# EAGLE board IR_Interruptor board (EAGLE 9.6.2)
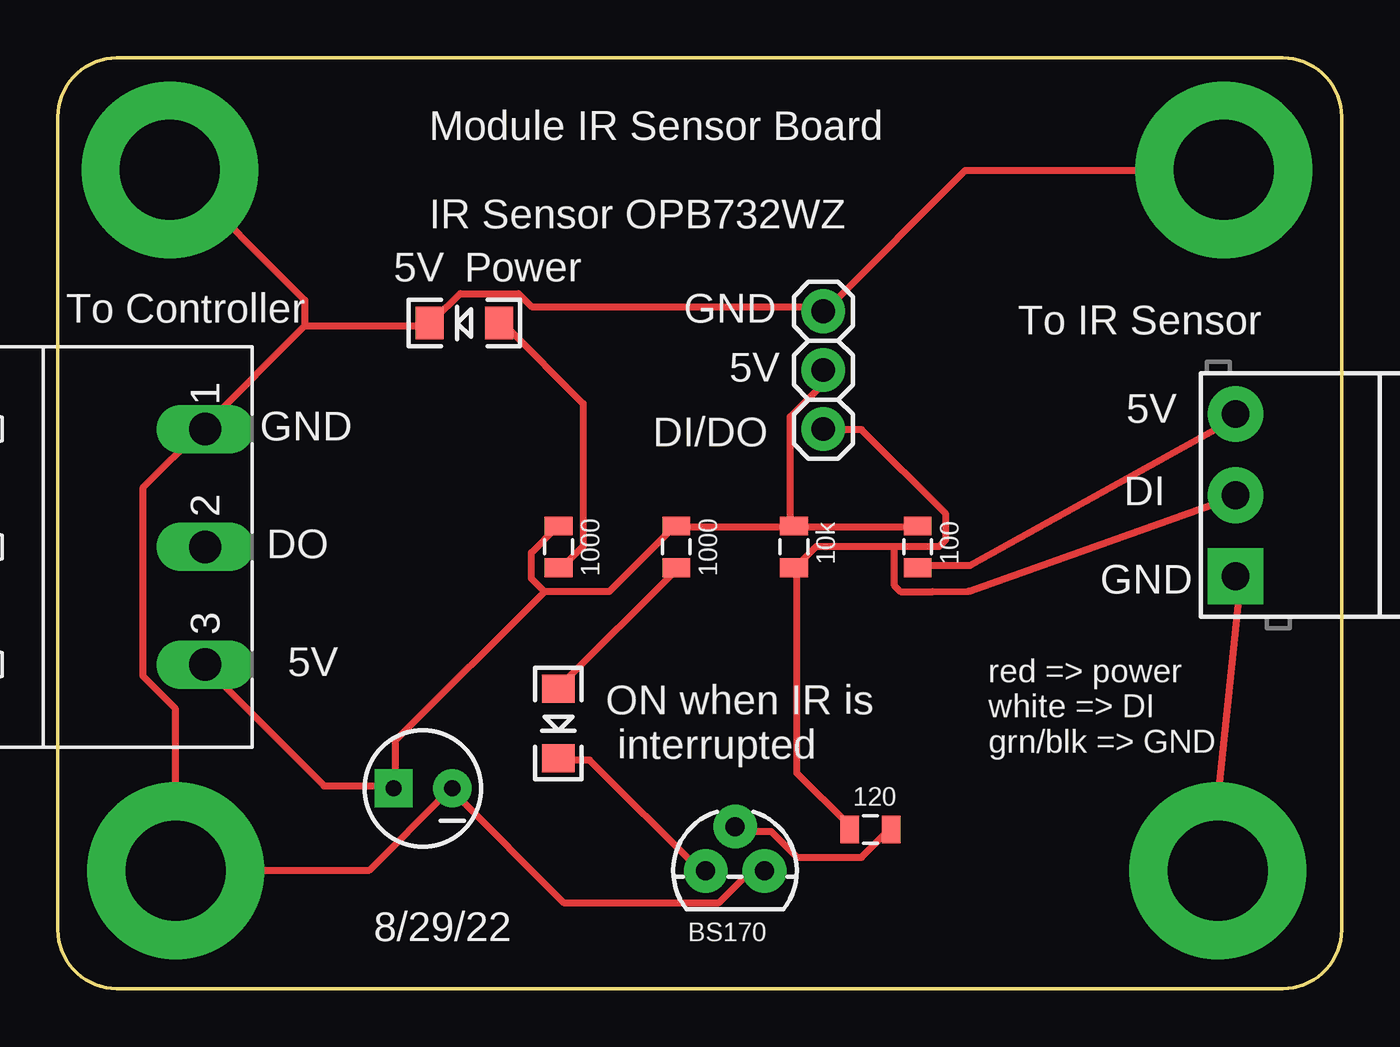
[diagram p0: board, top side]
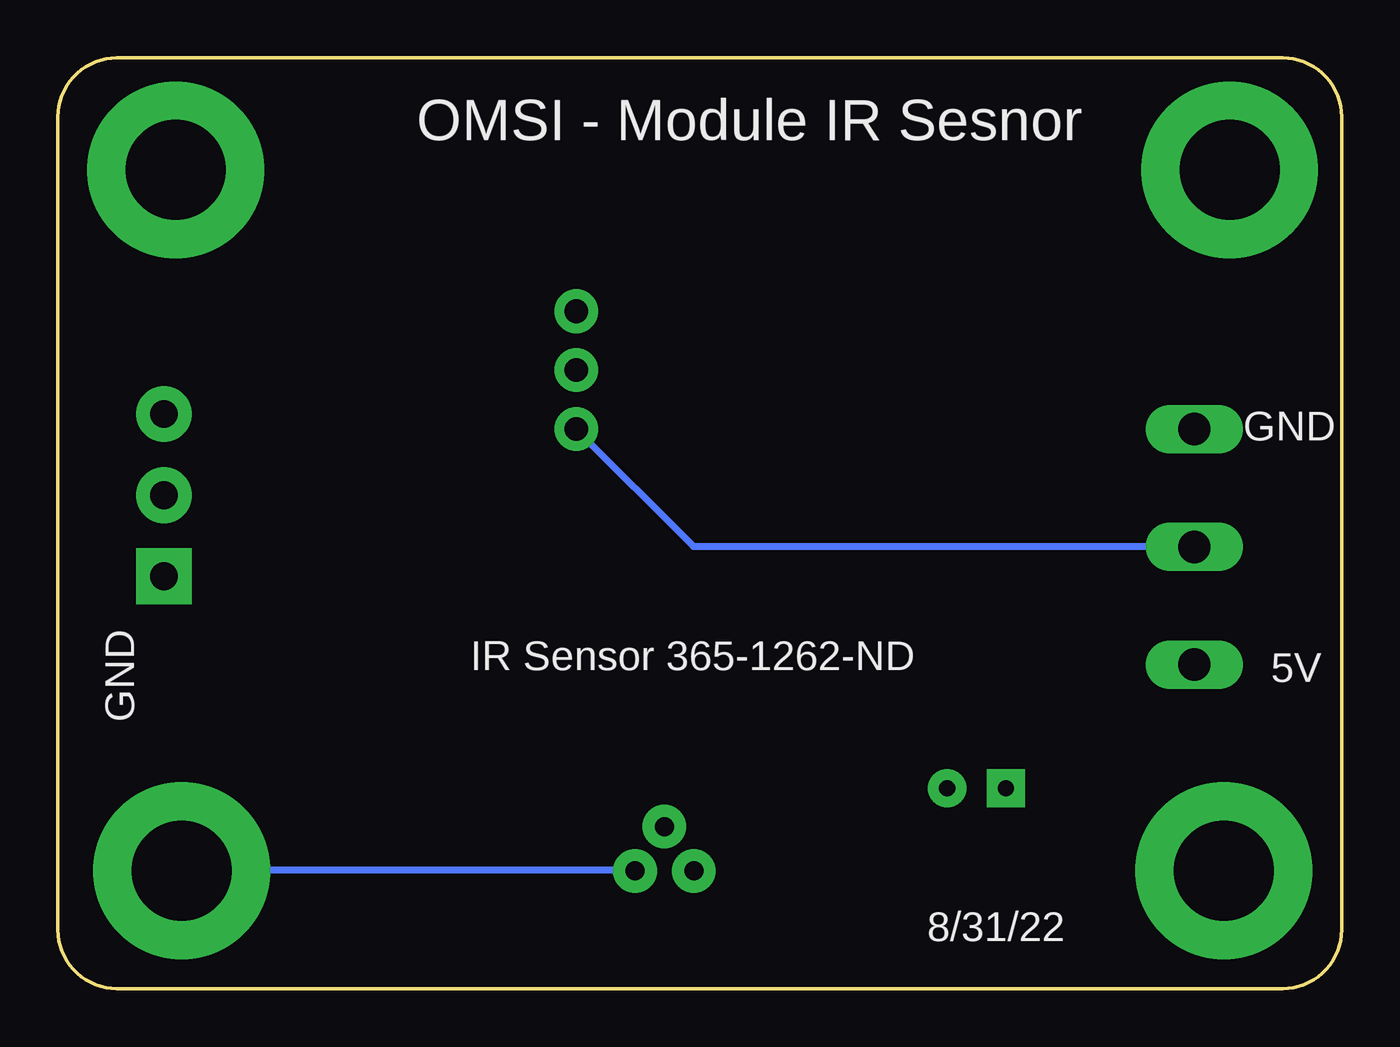
[diagram p1: board, bottom side, seen from below]

Size 55.37 x 40.13 mm. Coordinates in mm from the lower left corner, seen from the top.
Outline: 0,37.59 0,2.54 arc90 2.54,0 52.83,0 arc90 55.37,2.54 55.37,37.59 arc90 52.83,40.13 2.54,40.13 arc90 0,37.59
Copper layers (1*16): Top 0.035559375mm / dielectric 1.6mm / Bottom 0.035559375mm
Design rules "oshpark-2layer (1) *": minimum track width 12mil, minimum drill 10mil, track to track 10mil, track to pad 10mil, pad to pad 10mil, via to via 10mil, smd to smd 10mil, copper to edge 10mil, drill to drill 6mil, minimum pad ring 5mil, minimum via ring 5mil, stop-mask expansion 2.5mil, vias tented up to drill 25mil, thermal gap 10mil

## Footprints (pad centres in the part's own frame; a part is rotated, then mirrored left to right if it is on the bottom)
CPOL-RADIAL-10UF-25V = drill 0.7 pad 1.651 square: 1 1.27,0 | drill 0.7 pad 1.651: 2 -1.27,0
LED-1206 = smd 1.2 x 1.4: A -1.5,0; C 1.5,0
1X01 = drill 1.016 pad 1.88: 1 0,0
SCREWTERMINAL-3.5MM-3 = drill 1.2 pad 2.413 square: 1 0,0 | drill 1.2 pad 2.413: 2 3.5,0; 3 7,0
TO-92 = drill 0.813 pad 1.88: 1 -1.27,0; 2 0,1.905; 3 1.27,0
0805 = smd 0.8 x 1.2: 1 -0.9,0; 2 0.9,0
STANDOFF-ELECTRICAL = drill 4.318 pad 7.62: P1 0,0
MSTBA3 = drill 1.397 long: 1 -5.08,5.08; 2 0,5.08; 3 5.08,5.08

## Placement (x,y rotation side)
C2  [CPOL-RADIAL-10UF-25V]  15.75,8.64 180 top
D1  [LED-1206]  17.53,28.7 180 top
D10  [LED-1206]  21.59,11.43 270 top
J1  [1X01]  33.02,26.67 180 top
J6  [1X01]  33.02,29.21 0 top
J9  [1X01]  33.02,24.13 180 top
J27  [SCREWTERMINAL-3.5MM-3]  50.8,17.78 90 top
Q1  MOSFET-NCHANNELBS170  [TO-92]  29.21,5.08 0 top
R1  180  [0805]  37.08,19.05 90 top
R2  10k  [0805]  31.75,19.05 270 top
R3  1000  [0805]  26.67,19.05 270 top
R4  100  [0805]  35.05,6.86 180 top
R5  1000  [0805]  21.59,19.05 270 top
S1  STANDOFF_ELECTRICAL  [STANDOFF-ELECTRICAL]  4.83,35.31 0 top
S2  STANDOFF_ELECTRICAL  [STANDOFF-ELECTRICAL]  5.08,5.08 0 top
S3  STANDOFF_ELECTRICAL  [STANDOFF-ELECTRICAL]  50.04,5.08 0 top
S4  STANDOFF_ELECTRICAL  [STANDOFF-ELECTRICAL]  50.29,35.31 0 top
X4  MSTBA3  [MSTBA3]  1.27,19.05 270 top

## Library data of the parts
C2 R1-R5 = SparkFun-Passives
D1 D10 = SparkFun-LED
J1 J6 J9 = SparkFun-Connectors
J27 = SparkFun-Connectors; PROD_ID: CONN-08288
Q1 = SparkFun-DiscreteSemi
S1-S4 = th_libraries; SPICEPREFIX: X
X4 = con-phoenix-508; MF: FARNELL; MPN: 1757255; OC_FARNELL: 3705183; OC_NEWARK: 71C4162

## Nets
5V: C2.1 J1.1 R1.2 R2.1 R3.1 R5.1 X4.3
DO: J9.1 J27.2 R2.2 R4.2 X4.2
GND: C2.2 D1.C J6.1 J27.1 Q1.3 S1.P1 S2.P1 S3.P1 S4.P1 X4.1
N$1: Q1.2 R4.1
N$2: D10.C Q1.1
N$3: D1.A R5.2
N$4: D10.A R3.2
POWER: J27.3 R1.1

## Tracks (layer width: path | path; a pad name or v marks a point on that pad's centre or on a via)
5V
  Top 0.305: X4.3 6.45,13.77 11.48,8.74 14.27,8.74 C2.1 14.55,8.74 14.55,10.69 20.98,17.12 | 20.98,17.12 20.42,17.68 20.42,18.8 21.54,19.91 R5.1 | 20.98,17.12 23.77,17.12 26.57,19.91 R3.1 26.85,19.91 31.6,19.91 R2.1 | R1.2 36.91,19.91 31.88,19.91 R2.1 | J1.1 32.99,26.62 32.99,26.06 31.6,24.66 31.6,20.19 R2.1
DO
  Top 0.305: R4.2 34.11,7.06 31.88,9.3 31.88,17.96 R2.2 31.88,18.24 32.72,19.08 36.07,19.08 | 36.07,19.08 38.02,19.08 38.3,19.35 38.3,20.47 34.67,24.1 33.27,24.1 J9.1 | 36.07,19.08 36.07,17.4 36.35,17.12 37.74,17.12 39.29,17.15 50.75,21.21 J27.2
  Bottom 0.305: J9.1 27.97,19.08 6.45,19.08 X4.2
GND
  Top 0.305: J27.1 51.03,17.58 49.76,5.38 50.04,5.11 S3.P1 | Q1.3 30.48,4.83 29.64,4.83 28.52,3.71 21.82,3.71 17.07,8.46 C2.2 16.79,8.46 13.44,5.11 5.33,5.11 S2.P1 5.05,5.11 5.05,12.09 3.66,13.49 3.66,21.59 6.17,24.1 X4.1 6.45,24.38 10.64,28.58 | 10.64,28.58 15.95,28.58 D1.C 16.23,28.85 17.35,29.97 19.86,29.97 20.42,29.41 32.99,29.41 J6.1 33.27,29.41 39.14,35.28 50.04,35.28 S4.P1 | 10.64,28.58 10.64,29.69 5.05,35.28 S1.P1
  Bottom 0.305: S3.P1 50.04,5.11 30.48,5.11 Q1.3
N$1
  Top 0.305: R4.1 35.79,6.78 34.67,5.66 31.88,5.66 30.76,6.78 29.36,6.78 Q1.2
N$2
  Top 0.305: D10.C 21.82,9.86 22.94,9.86 27.69,5.11 Q1.1
N$3
  Top 0.305: R5.2 21.82,18.24 22.66,19.08 22.66,25.22 19.3,28.58 D1.A
N$4
  Top 0.305: R3.2 26.57,17.96 21.82,13.21 D10.A
POWER
  Top 0.305: R1.1 37.19,18.24 39.34,18.24 50.75,24.56 J27.3

## Text on the board
tPlace: Module IR Sensor Board | IR Sensor OPB732WZ | 5V | Power | To Controller | GND | To IR Sensor | 5V | 5V | GND | DI/DO | DI | DO | 10k | 100 | 1000 | 1000 | GND | 5V | ON when IR is / interrupted | red => power / white => DI / grn/blk => GND | 120 | 8/29/22 | BS170
bPlace: OMSI - Module IR Sesnor | GND | GND | 5V | IR Sensor 365-1262-ND | 8/31/22